# Altium PCB PCB1.PcbDoc
Units mm, origin at the board's own origin, x right, y up, seen from the top; angles counter-clockwise.
Board outline 136.14 x 98.81 mm, 2 copper layers (Top Layer, Bottom Layer); 78 components, 72 nets, 268 pads, 20 vias.
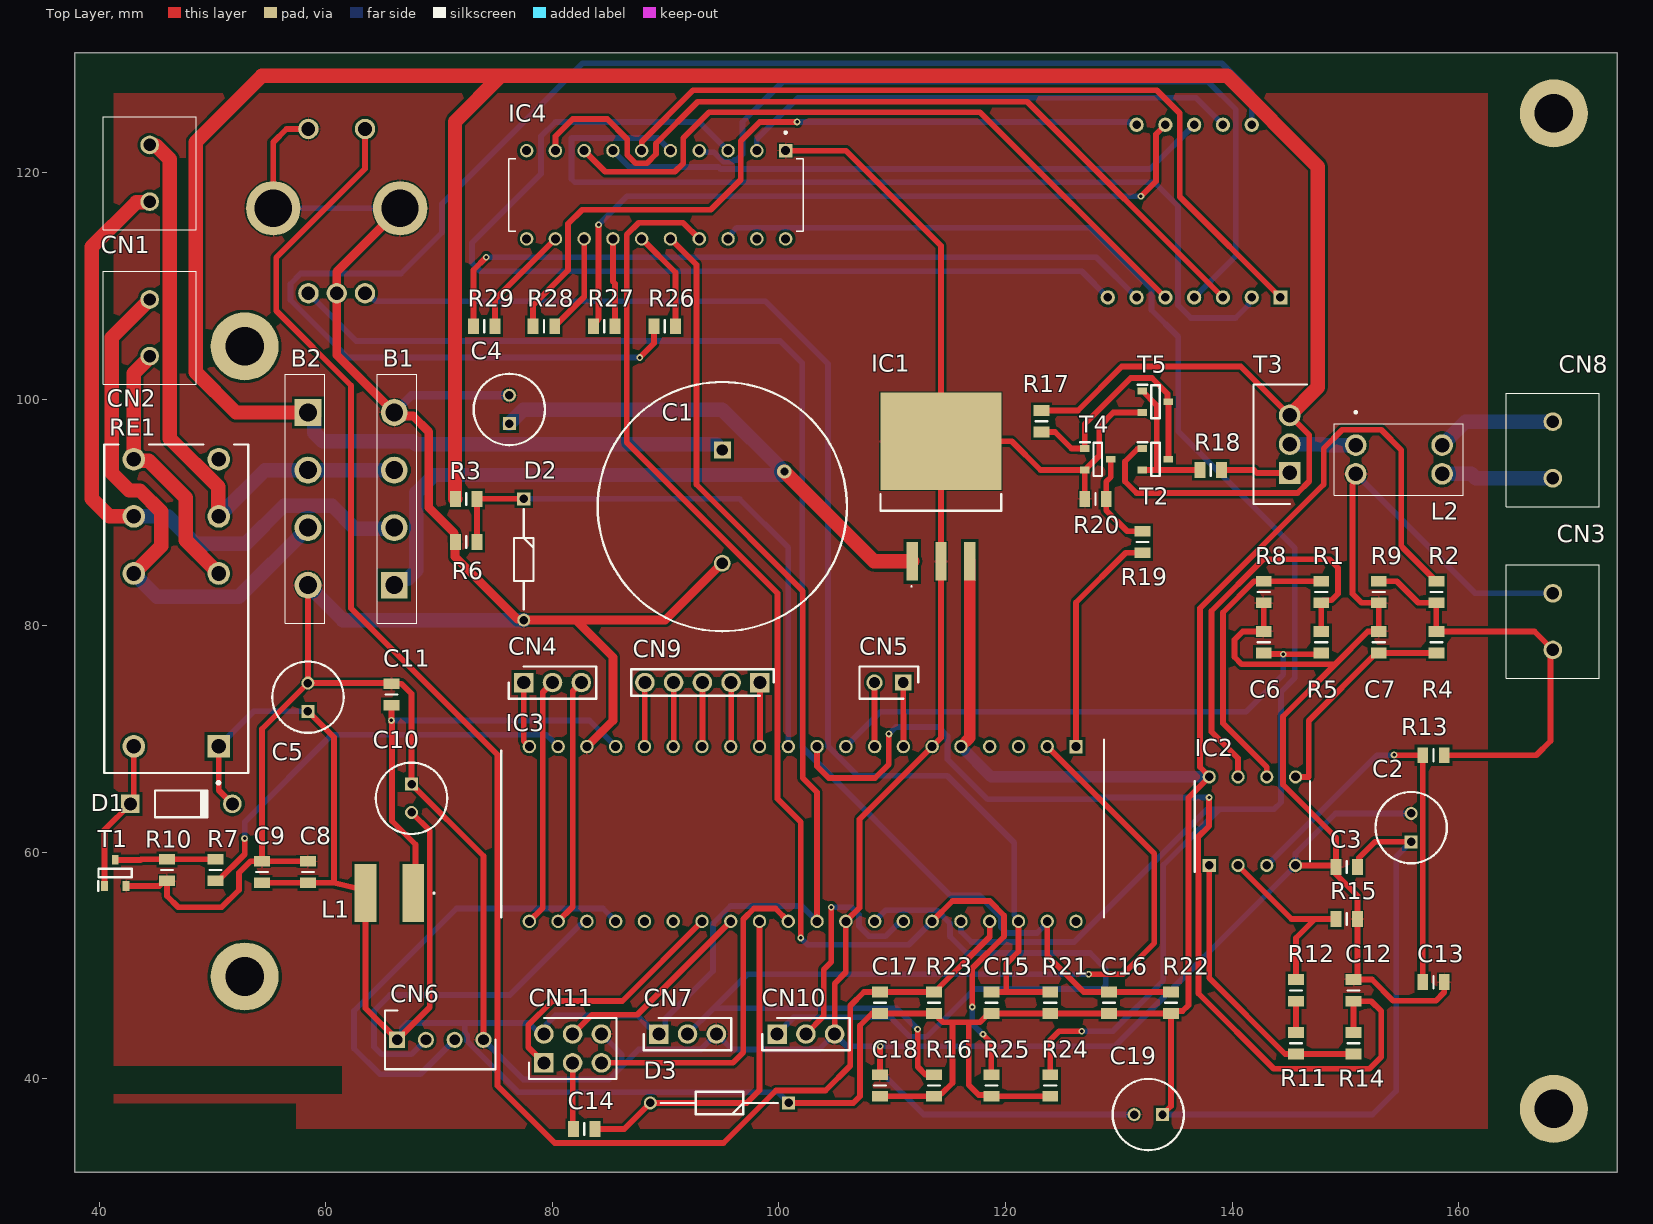
[diagram p0: Top Layer view]
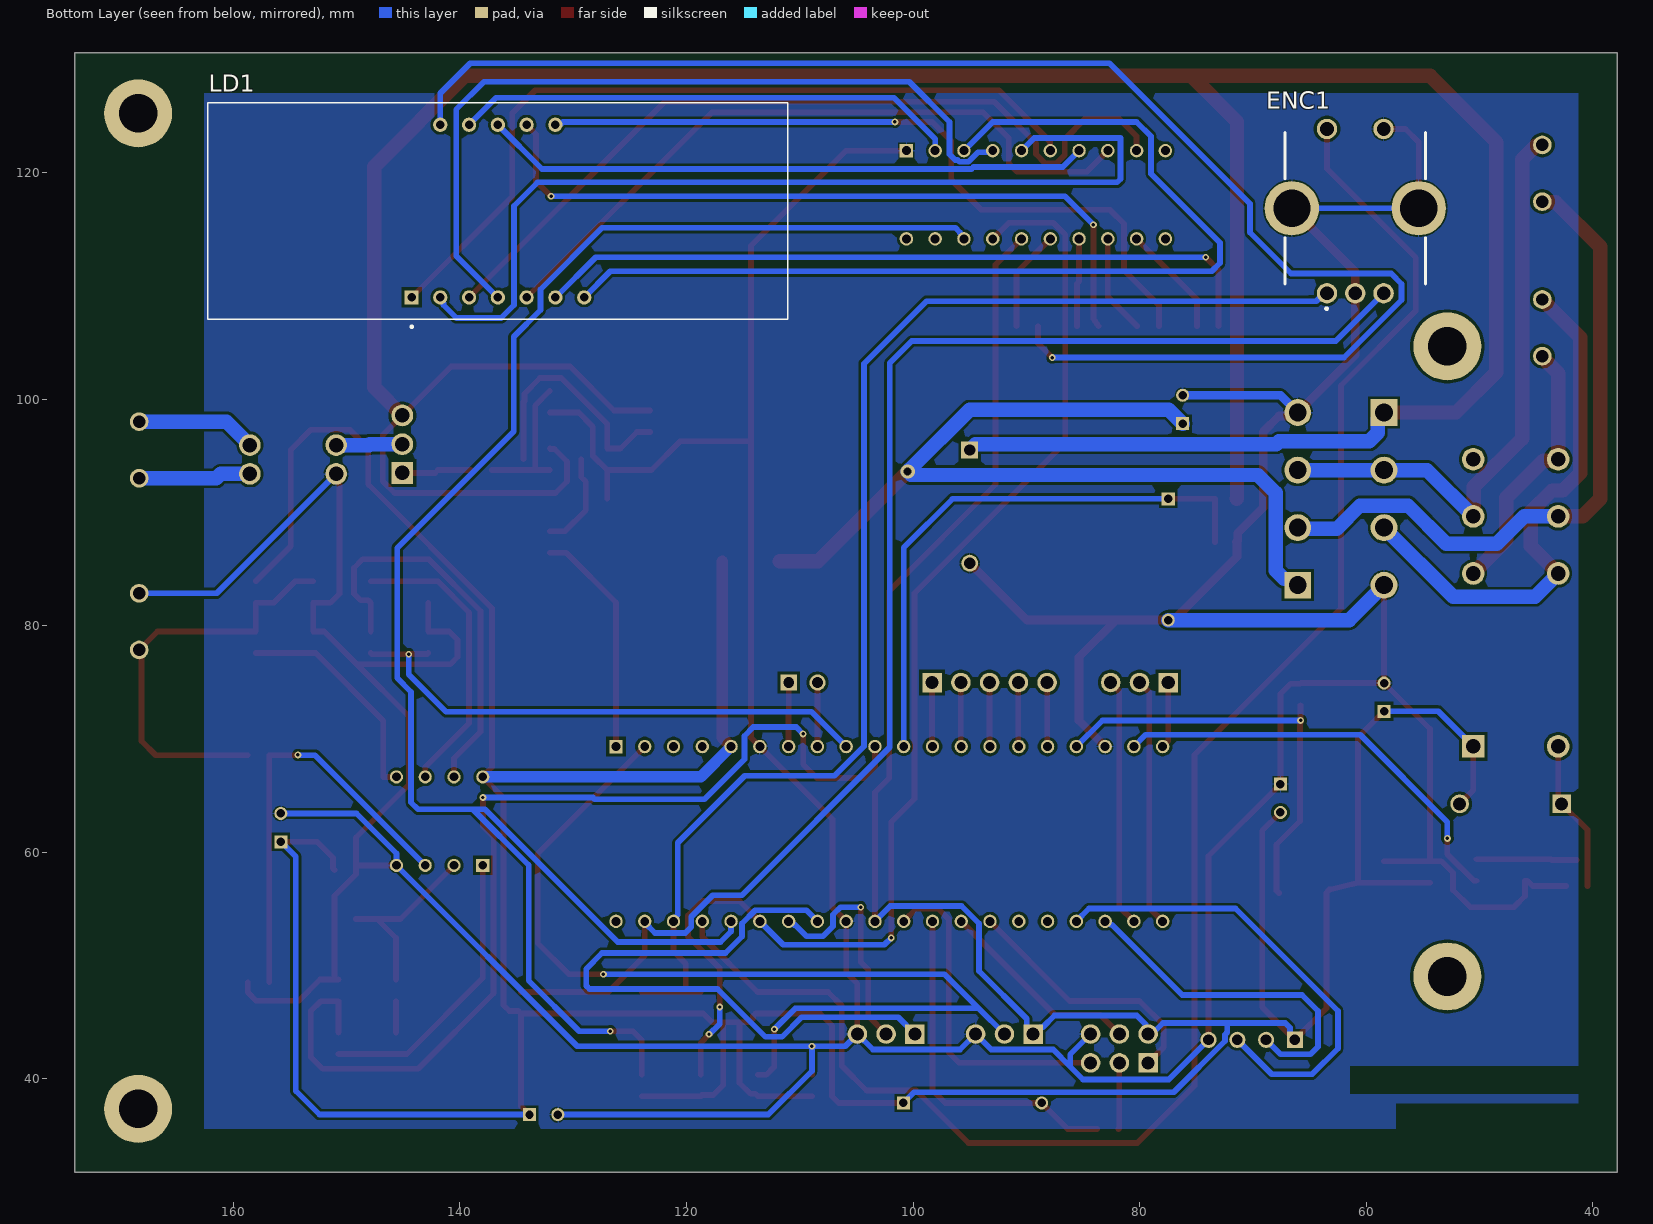
[diagram p1: Bottom Layer view, seen from below]
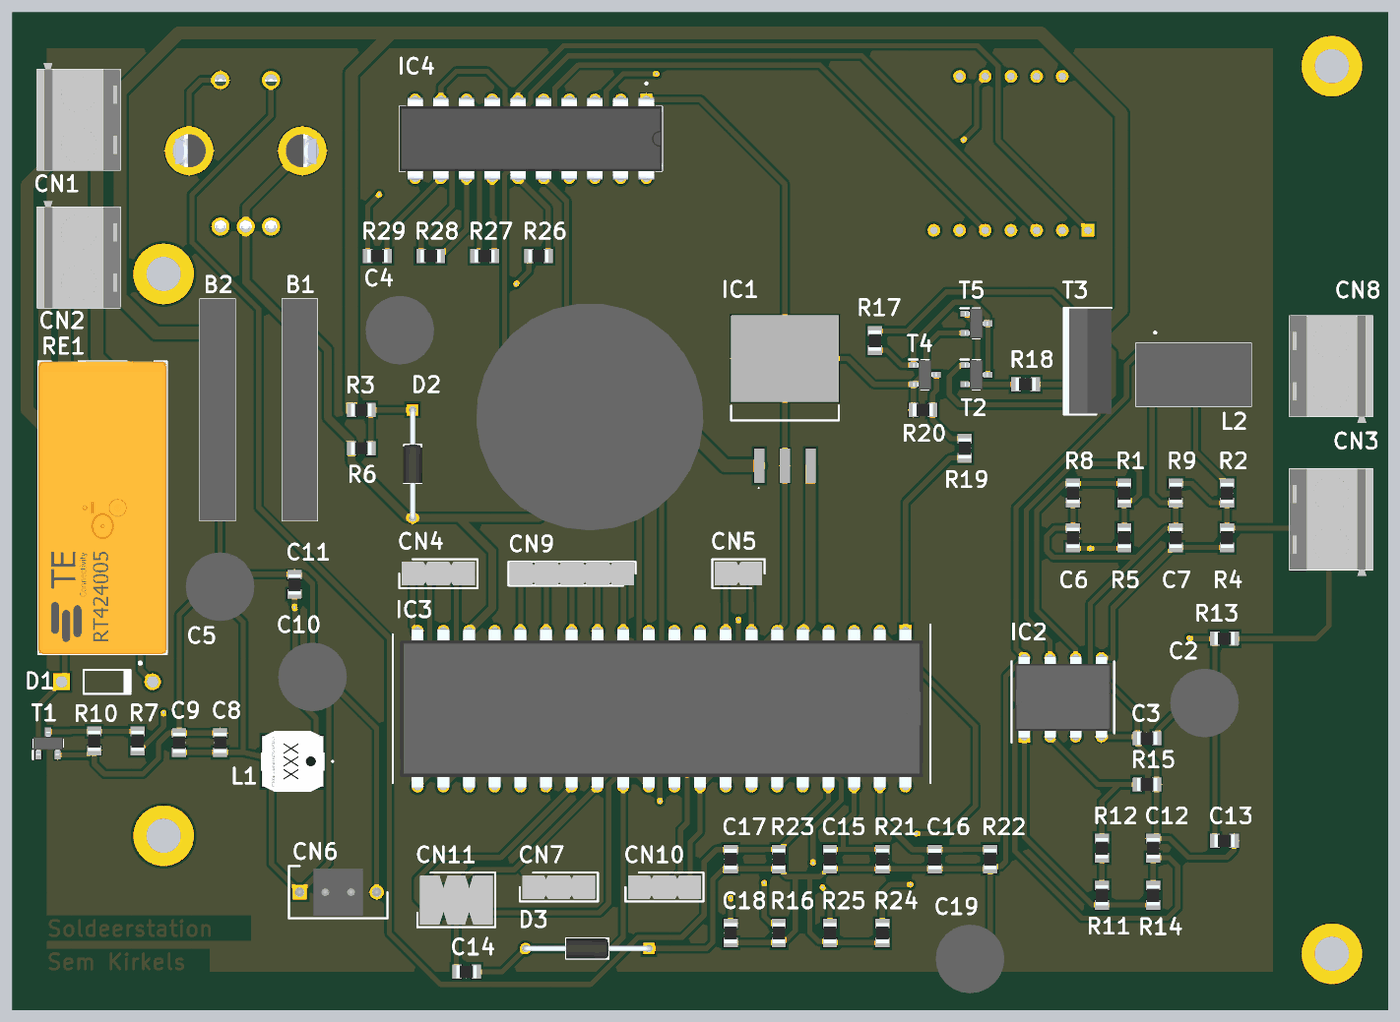
[diagram p2: 3D render of the assembled board from above, using the file's embedded part models]

## Layer stack, top to bottom
Top Solder: solder mask 0.0102, Solder Resist, Dk 3.5
Top Layer: signal copper 0.0356
Dielectric 1: dielectric 0.32, FR-4, Dk 4.8
Bottom Layer: signal copper 0.0356
Bottom Solder: solder mask 0.0102, Solder Resist, Dk 3.5

## Board outline
37.846,31.75 173.99,31.75 173.99,130.556 37.846,130.556

## Design rules (kind name [scope] priority, off if disabled: settings)
BoardOutlineClearance [All] p1: gap=0.2 ignorepadtopadclearanceinfootprint=FALSE
Clearance Clearance_2 [InNamedPolygon('GND_L02_P003')] p1: gap=0.254 ignorepadtopadclearanceinfootprint=FALSE except(0: Arc-Hole Track-Hole SMDPad-Hole THPad-Hole Via-Hole Fill-Hole Poly-Hole Region-Hole Text-Hole)
Clearance Clearance_1 [InNamedPolygon('GND_L01_P001')] p2: gap=0.254 ignorepadtopadclearanceinfootprint=FALSE except(0: Arc-Hole Track-Hole SMDPad-Hole THPad-Hole Via-Hole Fill-Hole Poly-Hole Region-Hole Text-Hole)
Clearance [All] p3: gap=0.127 ignorepadtopadclearanceinfootprint=FALSE except(0.25: Arc-Hole Track-Hole SMDPad-Hole THPad-Hole Via-Hole Fill-Hole Poly-Hole Region-Hole Text-Hole)
ComponentClearance [All] p1: gap=0.127 collisioncheckmode=3 verticalgap=0.127 showdistances=TRUE
DiffPairsRouting [All] p1: maxlimit=0.254 minlimit=0.127 mostfreqgap=0.127 toplayer_minwidth=0.127 toplayer_maxwidth=25.4 toplayer_prefwidth=0.127 bottomlayer_minwidth=0.127 bottomlayer_maxwidth=25.4 bottomlayer_prefwidth=0.127 maxuncoupledlength=12.7
Height [All] p1: minheight=0 maxheight=1816.048 prefheight=12.7
HoleSize [All] p1: absolutevalues=TRUE maxlimit=6.3 minlimit=0.3 maxpercent=80.000 minpercent=20.000
HoleToHoleClearance [All] p1: gap=0.25 allowstackedmicrovias=FALSE
MinimumAnnularRing [All] p1: minimumring=0.076
MinimumSolderMaskSliver [All] p1: minsoldermaskwidth=0
PlaneClearance [All] p1: clearance=0.127
PlaneConnect PlaneConnectPowerPads [InPadClass('PowerPads')] p1: planeconnectstyle=Direct reliefexpansion=0.508 reliefentries=4 reliefconductorwidth=0.254 reliefairgap=0.254
PlaneConnect [All] p2: pad.planeconnectstyle=Relief pad.reliefexpansion=0.3 pad.reliefentries=4 pad.reliefconductorwidth=0.127 pad.reliefairgap=0.127 via.planeconnectstyle=Direct via.reliefexpansion=0.3 via.reliefentries=4 via.reliefconductorwidth=0.127 via.reliefairgap=0.127
PolygonConnect PolygonConnectPowerPads [All vs (InPadClass('PowerPads'))] p1: connectstyle=Direct reliefconductorwidth=0.254 reliefentries=4 polygonreliefangle="90 Angle" airgapwidth=0.254
PolygonConnect [All] p2: thpad.connectstyle=Relief thpad.reliefconductorwidth=0.127 thpad.reliefentries=4 thpad.polygonreliefangle="90 Angle" thpad.airgapwidth=0.127 smdpad.connectstyle=Relief smdpad.reliefconductorwidth=0.127 smdpad.reliefentries=4 smdpad.polygonreliefangle="90 Angle" smdpad.airgapwidth=0.127 via.connectstyle=Direct via.reliefconductorwidth=0.127 via.reliefentries=4 via.polygonreliefangle="90 Angle" via.airgapwidth=0.127
RoutingVias [All] p1: holewidth=0.3 width=0.6 viastyle="Through Hole" minholewidth=0.3 minwidth=0.6 maxholewidth=0.6 maxwidth=6.6
SilkToSilkClearance [All] p1: silktosilkclearance=0
SilkToSolderMaskClearance [IsPad] p1: minsilkscreentomaskgap=0.127 clearancetoexposedcopper=TRUE
SolderMaskExpansion [All] p1: expansion=0.075 istentingtop=FALSE
Width [All] p1: maxlimit=25.4 minlimit=0.127 preferedwidth=0.127 minimp=50.000000 maximp=50.000000 favimp=50.000000
20 further rules are at their usual default settings.

## Classes and differential pairs
component class Voeding_Soldeerbout: B1 B2 C1 C4 C5 CN1 CN2 D1 D2 IC1 R3 R6 R7 R10 RE1 T1
component class Versterker: C2 C3 C6 C7 C12 C13 CN3 IC2 R1 R2 R4 R5 R8 R9 R11 R12 R13 R14 R15
component class Regelaar: CN8 L2 R17 R18 R19 R20 T2 T3 T4 T5
component class Display: C15 C16 C17 C18 C19 ENC1 IC4 LD1 R21 R22 R23 R24 R25 R26 R27 R28 R29
component class CPU: C8 C9 C10 C11 C14 CN4 CN5 CN6 CN7 CN9 CN10 CN11 D3 IC3 L1 R16

## Components (designator, comment, footprint, x,y, rotation, side; value= is the part's Value field where it differs from the comment)
B1 "GBU6J" "Bridge Rectifier" 66.04,83.566 r270 top
B2 "GBU6J" "Bridge Rectifier" 58.42,98.806 r90 top
C1 "4700uF 50V" "Elco 4700uF 50V" 94.996,95.504 r270 top
C2 "10uF" "Elco 100uF 25V" 155.807,60.914 r90 top
C3 "10 nF" 0805 150.114,58.674 r180 top
C4 "100uF 25V" "Elco 100uF 25V" 76.2,97.83 r90 top
C5 "10uF 50V" "Elco 100uF 25V" 58.42,72.43 r90 top
C6 "10 nF" 0805 142.793,78.519 r90 top
C7 "10 nF" 0805 152.953,78.519 r90 top
C8 "10 nF" 0805 58.42,58.237 r90 top
C9 "10 nF" 0805 54.366,58.237 r90 top
C10 "10uF 50V" "Elco 100uF 25V" 67.564,66 r270 top
C11 "10 nF" 0805 65.786,73.914 r90 top
C12 "10 nF" 0805 150.727,47.796 r90 top
C13 "10 nF" 0805 157.782,48.521 r0 top
C14 "10 nF" 0805 82.804,35.56 r180 top
C15 "10 nF" 0805 118.75,46.711 r90 top
C16 "10 nF" 0805 129.126,46.703 r90 top
C17 "10 nF" 0805 108.925,46.703 r90 top
C18 "10 nF" 0805 108.925,39.393 r90 top
C19 "100uF 50V" "Elco 100uF 25V" 133.858,36.83 r180 top
CN1 "282836-2" 2828362 44.45,117.428 r270 top
CN2 "282836-2" 2828362 44.45,103.786 r270 top
CN3 "282836-2" 2828362 168.319,82.849 r90 top
CN4 "5-146280-3" HDRV3W97P0X254_1X3_721X234X821P 77.47,74.972 r0 top
CN5 "5-146280-2" HDRV2W77P0X254_1X2_467X234X872P 110.969,74.972 r180 top
CN6 "5-146280-4" HDRV4W77P254_4X1_467X488X821P 66.294,43.434 r270 top
CN7 "5-146280-3" HDRV3W97P0X254_1X3_721X234X821P 89.391,43.942 r0 top
CN8 "282836-2" 2828362 168.319,98.006 r90 top
CN9 "5-146280-5" HDRV5W67P0X254_1X5_1229X234X821P 98.323,74.972 r180 top
CN10 "5-146280-3" HDRV3W97P0X254_1X3_721X234X821P 99.838,43.942 r0 top
CN11 "2x3 Pin Header" HDRV6W67P254_2X3_721X488X872P 79.248,41.402 r0 top
D1 "1N4007-T" DIOD-DO-41-P-2_V 47.244,64.262 r0 top
D2 "5V1" DIOAD1068W53L380D172 77.47,91.186 r270 top
D3 "1N4148-B" DIOAD1220W56L420D200 100.846,37.858 r180 top
ENC1 "PEC11R-4225F-S0024" PEC12R-4XXXF-SXXXX_1 60.96,116.84 r180 bottom
IC1 "TL780-05CKTTR" "DC-DC Convertor" 114.3,92.411 r0 top
IC2 "MCP6002-I/P" Opamp 141.793,62.733 r90 top
IC3 "ATMEGA4809-PF" DIP1543W58P254L5175H635Q40N 102.094,61.606 r270 top
IC4 "TM1637" TM1637 89.154,118.03 r270 top
L1 "10uH" VLS6045 65.6,56.388 r180 top
L2 "Smoorspoel commom mode" CM2545X171B10 150.92,95.936 r270 top
LD1 "HDSP-B09G" "7 Segment Display" 136.652,116.586 r180 bottom
R1 "18k" 0805 147.873,82.959 r90 top
R2 "1M" 0805 158.033,82.959 r90 top
R3 "68k" 0805 72.39,91.186 r180 top
R4 "5k6" 0805 158.033,78.519 r90 top
R5 "5k6" 0805 147.873,78.519 r90 top
R6 "10k" 0805 72.39,87.376 r0 top
R7 "10k" 0805 50.254,58.42 r90 top
R8 "100" 0805 142.793,82.959 r90 top
R9 "10M" 0805 152.953,82.959 r90 top
R10 "4k7" 0805 45.974,58.42 r90 top
R11 "18k" 0805 145.647,43.134 r270 top
R12 "18k" 0805 145.647,47.796 r90 top
R13 "5k6" 0805 157.782,68.55 r0 top
R14 "5k6" 0805 150.727,43.134 r270 top
R15 "100" 0805 150.114,54.102 r0 top
R16 "4k7" 0805 113.69,39.393 r90 top
R17 "4k7" 0805 123.19,98.044 r90 top
R18 "100" 0805 138.11,93.726 r0 top
R19 "10k" 0805 132.08,87.376 r90 top
R20 "4k7" 0805 127.95,91.186 r0 top
R21 "10k" 0805 123.946,46.711 r90 top
R22 "10k" 0805 134.606,46.711 r90 top
R23 "10k" 0805 113.69,46.711 r90 top
R24 "4k7" 0805 123.946,39.393 r90 top
R25 "4k7" 0805 118.75,39.393 r90 top
R26 "200" 0805 89.916,106.426 r180 top
R27 "200" 0805 84.582,106.426 r180 top
R28 "200" 0805 79.248,106.426 r180 top
R29 "200" 0805 73.98,106.426 r180 top
RE1 "RT424005" FP-RT424005-MFG 46.796,81.492 r90 top
T1 "CMPT5551" SOT95P230X109-3N 41.402,58.166 r90 top
T2 "CMPT5551" SOT95P230X109-3N 133.23,94.676 r0 top
T3 "IRF9Z34NPBF" TO254P469X1042X1967-3P 145.087,93.471 r90 top
T4 "CMPT5551" SOT95P230X109-3N 128.15,94.676 r0 top
T5 "CMPT5551" SOT95P230X109-3N 133.23,99.756 r0 top

## Footprints (in the part's own frame and the unit in brackets; to place one, negate y for a bottom-side part, rotate by r counter-clockwise, add the part's x,y. Pads: shape width x height; smd on the part's side, far side on the other; paste and mask are expansions set on the pad)
"7 Segment Display" [mm]
  rect 1.262x1.262 hole 0.754: 1(-7.62,-7.62)
  round 1.262 hole 0.754: 2(-5.08,-7.62) 3(-2.54,-7.62) 4(0,-7.62) 5(2.54,-7.62) 6(5.08,-7.62) 7(7.62,-7.62) 8(5.08,7.62) 9(2.54,7.62) 10(0,7.62) 11(-2.54,7.62) 12(-5.08,7.62)
  silkscreen extent -25.6,-10.3 25.6,9.55
0805 [mm]
  rect 0.95x1.4 smd: 1(-0.95,0) 2(0.95,0)
  silkscreen extent 0,-0.53 0,0.52, body extent -1,-0.63 1,0.63, height 0.6
2828362 [mm]
  round 1.65 hole 1.1: 1(0,0) 2(-5,0)
  silkscreen extent -7.5,-4.1 2.5,4.1, body extent -8.09,-4.1 2.51,4.1, height 10.02
"Bridge Rectifier" [mm]
  rect 2.37x2.37 hole 1.58: 1(0,0)
  round 2.37 hole 1.58: 2(-5.08,0) 3(-10.16,0) 4(-15.24,0)
  silkscreen extent -18.62,-1.5 3.38,2, body extent -18.62,-1.5 3.38,2, height 18.9
CM2545X171B10 [mil]
  round 75 hole 50: 1(0,0) 2(100,0) 3(100,300) 4(0,300)
  silkscreen extent -118,-74 174,374, body extent -74,-74 174,374, height 378
"DC-DC Convertor" [mm]
  rect 1x3.4 smd: 1(-2.54,-6.745) 2(0,-6.745) 3(2.54,-6.745)
  rect 10.7x8.6 smd: 4(0,3.855)
  silkscreen extent -5.33,-9 5.33,-0.8
DIOAD1068W53L380D172 [mm]
  rect 1.15x1.15 hole 0.75: 1(0,0)
  round 1.15 hole 0.75: 2(10.7,0)
  silkscreen extent 0.93,-0.86 9.77,0.86, body extent -0.26,-0.95 10.95,0.95, height 1.9
DIOAD1220W56L420D200 [mm]
  rect 1.15x1.15 hole 0.75: 1(0,0)
  round 1.15 hole 0.75: 2(12.2,0)
  silkscreen extent 0.93,-1 11.27,1, body extent -0.28,-1 12.48,1, height 1.99
DIOD-DO-41-P-2_V [mm] "2-Leads, Axial Lead, Body 4.635x2.36mm, Pin Spacing 9mm"
  rect 1.65x1.65 hole 1.15: 1(-4.5,0)
  round 1.65 hole 1.15: 2(4.5,0)
  silkscreen extent -2.32,-1.18 2.32,1.18, body extent -4.93,-1.18 4.93,1.18, height 2.35
DIP1543W58P254L5175H635Q40N [mil]
  rect 46.61x46.61 hole 30.87: 1(-303.74,950)
  round 46.61 hole 30.87: 2(-303.74,850) 3(-303.74,750) 4(-303.74,650) 5(-303.74,550) 6(-303.74,450) 7(-303.74,350) 8(-303.74,250) 9(-303.74,150) 10(-303.74,50) 11(-303.74,-50) 12(-303.74,-150) 13(-303.74,-250) 14(-303.74,-350) 15(-303.74,-450) 16(-303.74,-550) 17(-303.74,-650) 18(-303.74,-750) 19(-303.74,-850) 20(-303.74,-950) 21(303.74,-950) 22(303.74,-850) 23(303.74,-750) 24(303.74,-650) 25(303.74,-550) 26(303.74,-450) 27(303.74,-350) 28(303.74,-250) 29(303.74,-150) 30(303.74,-50) 31(303.74,50) 32(303.74,150) 33(303.74,250) 34(303.74,350) 35(303.74,450) 36(303.74,550) 37(303.74,650) 38(303.74,750) 39(303.74,850) 40(303.74,950)
  silkscreen extent -327,-1047 290,1047, body extent -309,-1019 309,1019, height 250
"Elco 100uF 25V" [mm]
  rect 1.15x1.15 hole 0.75: 1(0,0)
  round 1.15 hole 0.75: 2(2.5,0)
  silkscreen extent -1.9,-3.15 4.4,3.15, body extent -2.15,-3.4 4.65,3.4, height 12.7
"Elco 4700uF 50V" [mm]
  rect 1.5x1.5 hole 1: 1(0,0)
  round 1.5 hole 1: 2(10,0)
  silkscreen extent -6,-11 16,11, body extent -6.25,-11.25 16.25,11.25, height 37
FP-RT424005-MFG [mm]
  round 2 hole 1.3 paste-1000 mask+0: 11(8.15,-3.75) 12(3.11,-3.75) 14(13.19,-3.75) 21(8.15,3.75) 22(3.11,3.75) 24(13.19,3.75) A2(-12.15,3.75)
  rect 2x2 hole 1.3 paste-1000 mask+0: A1(-12.15,-3.75)
  silkscreen extent -15.5,-6.35 14.5,6.35, body extent -14.6,-6.45 14.6,6.45, height 0.25
HDRV2W77P0X254_1X2_467X234X872P [mm]
  rect 1.425x1.425 hole 0.95: 1(0,0)
  round 1.425 hole 0.95: 2(2.54,0)
  silkscreen extent -1.32,-1.43 3.86,1.42, body extent -1.07,-1.17 3.61,1.17, height 8.12
HDRV3W97P0X254_1X3_721X234X821P [mm]
  rect 1.725x1.725 hole 1.15: 1(0,0)
  round 1.725 hole 1.15: 2(2.54,0) 3(5.08,0)
  silkscreen extent -1.32,-1.42 6.4,1.43, body extent -1.07,-1.17 6.15,1.17, height 8.12
HDRV4W77P254_4X1_467X488X821P [mm]
  rect 1.425x1.425 hole 0.95: 1(0,0)
  round 1.425 hole 0.95: 2(0,2.54) 3(0,5.08) 4(0,7.62)
  silkscreen extent -2.59,-1.06 2.59,8.68, body extent -2.33,-0.38 2.33,8, height 8.21
HDRV5W67P0X254_1X5_1229X234X821P [mm]
  rect 1.725x1.725 hole 1.15: 1(0,0)
  round 1.725 hole 1.15: 2(2.54,0) 3(5.08,0) 4(7.62,0) 5(10.16,0)
  silkscreen extent -1.21,-1.17 11.37,1.17, body extent -1.07,-1.17 11.23,1.17, height 8.12
HDRV6W67P254_2X3_721X488X872P [mm]
  rect 1.725x1.725 hole 1.15: 1(0,0)
  round 1.725 hole 1.15: 2(0,2.54) 3(2.54,0) 4(2.54,2.54) 5(5.08,0) 6(5.08,2.54)
  silkscreen extent -1.32,-1.42 6.4,3.96, body extent -1.07,-1.17 6.15,3.71, height 8.12
Opamp [mm]
  rect 1.159x1.159 hole 0.759: 1(-3.905,3.81)
  round 1.159 hole 0.759: 2(-3.905,1.27) 3(-3.905,-1.27) 4(-3.905,-3.81) 5(3.905,-3.81) 6(3.905,-1.27) 7(3.905,1.27) 8(3.905,3.81)
  silkscreen extent -4.48,-5.08 3.56,5.08, body extent -4.05,-4.75 4.05,4.75, height 5.33
PEC12R-4XXXF-SXXXX_1 [mm]
  round 1.8 hole 1.2: 1(-2.5,-7.5) 2(2.5,-7.5) 3(0,-7.5) 4(-2.5,7) 5(2.5,7)
  round 4.8 hole 3.28: 6(5.6,0) 7(-5.6,0)
  silkscreen extent -6.2,-8.95 6.2,6.7, body extent -7,-7.75 6.99,7.15, height 31.51
SOT95P230X109-3N [mm]
  rect 0.85x0.6 smd: 1(-1.15,0.95) 2(-1.15,-0.95) 3(1.15,0)
  silkscreen extent -1.58,-1.46 0.38,1.5, body extent -1.15,-1.46 1.15,1.46, height 1.09
TM1637 [mm]
  rect 1.19x1.19 hole 0.79: 1(-3.89,11.43)
  round 1.19 hole 0.79: 2(-3.89,8.89) 3(-3.89,6.35) 4(-3.89,3.81) 5(-3.89,1.27) 6(-3.89,-1.27) 7(-3.89,-3.81) 8(-3.89,-6.35) 9(-3.89,-8.89) 10(-3.89,-11.43) 11(3.89,-11.43) 12(3.89,-8.89) 13(3.89,-6.35) 14(3.89,-3.81) 15(3.89,-1.27) 16(3.89,1.27) 17(3.89,3.81) 18(3.89,6.35) 19(3.89,8.89) 20(3.89,11.43)
  silkscreen extent -5.58,-13 3.2,13, body extent -4.03,-13 4.03,13, height 4.31
TO254P469X1042X1967-3P [mm]
  rect 1.92x1.92 hole 1.28: 1(0,0)
  round 1.92 hole 1.28: 2(2.54,0) 3(5.08,0)
  silkscreen extent -2.73,-1.49 7.81,3.2, body extent -2.67,-1.5 7.75,3.19, height 18.84
VLS6045 [mm]
  rect 1.9x5.1 smd: 1(-2.1,0) 2(2.1,0)
  silkscreen extent -4,-0.05 -3.9,0.05, body extent -3.15,-3 3.15,3, height 4.5

## Part data
B1 B2: "Bridge Rectifier", Manufacturer_Name="GeneSiC Semiconductor", Datasheet Link=https://www.diodemodule.com/silicon_products/bridge_rectifiers/gbu6j.pdf, Height=18.8mm, Manufacturer_Part_Number=GBU6J
C1 C2 C4 C5 C10 C19: library part "Condensator Elco", Manufacturer="AVX Interconnect / Elco", Part Number=02015A270JAT2A
C3 C6 C7 C8 C9 C11 C12 C13 C14 C15 C16 C17 C18: library part "Condensator 0805", "Chip Multilayer Ceramic Capacitors for General Purpose, 0805, 10uF, X5R, 15%, 10%, 25V", Capacitance=10uF, Case Code (Imperial)=0805, Case Code (Metric)=2012, Dielectric=X5R, Max Operating Temperature=85°C, Min Operating Temperature=-55°C, Package Quantity=1, Tolerance=10%, Voltage=25V, Case/Package=0805, Depth=1.25mm, Height=1.25mm, Lead Free="Lead Free", Length=2mm, Material=Ceramic, Mount="Surface Mount", Packaging="Tape and Reel", Radiation Hardening=No, Termination=SMD/SMT, Thickness=0.053inch, Voltage Rating=25V, Voltage Rating (DC)=25V, Width=0.049inch
CN1 CN2: library part "Schroefconnector 2 Pin", "Connector", Manufacturer_Name="TE Connectivity", Datasheet Link=https://www.te.com/commerce/DocumentDelivery/DDEController?Action=showdoc&DocId=Customer+Drawing%7F282836%7FJ%7Fpdf%7FEnglish%7FENG_CD_282836_J.pdf%7F282836-2, Height=10mm, Manufacturer_Part_Number=282836-2
CN3 CN8: library part "Schroefconnector 2 Pin R", "Connector", Manufacturer_Name="TE Connectivity", Datasheet Link=https://www.te.com/commerce/DocumentDelivery/DDEController?Action=showdoc&DocId=Customer+Drawing%7F282836%7FJ%7Fpdf%7FEnglish%7FENG_CD_282836_J.pdf%7F282836-2, Height=10mm, Manufacturer_Part_Number=282836-2
CN4 CN7: library part "3 Pin Header L", "Connector 5-146280-3", Manufacturer_Name="TE Connectivity", Mouser2 Part Number=571-5-146280-3, Datasheet Link=https://componentsearchengine.com//5-146280-3.pdf, Height=8.21mm, Manufacturer_Part_Number=5-146280-3, Mouser2 Price/Stock=https://www.mouser.com/Search/Refine.aspx?Keyword=571-5-146280-3
CN5: library part "2 Pin Header L", "Connector", Manufacturer_Name="TE Connectivity", Datasheet Link=http://www.te.com/commerce/DocumentDelivery/DDEController?Action=showdoc&DocId=Customer+Drawing%7F146280%7FH2%7Fpdf%7FEnglish%7FENG_CD_146280_H2.pdf%7F5-146280-2, Height=8.72mm, Manufacturer_Part_Number=5-146280-2
CN6: library part "4 Pin Header L", "Connector 5-146280-4", Manufacturer_Name="TE Connectivity", Datasheet Link=https://datasheet.datasheetarchive.com/originals/distributors/DKDS-20/396066.pdf, Height=8.21mm, Manufacturer_Part_Number=5-146280-4
CN9: library part "5 Pin Header", "Connector 5-146280-5", Manufacturer_Name="TE Connectivity", Mouser2 Part Number=571-5-146280-5, Datasheet Link=https://componentsearchengine.com//5-146280-5.pdf, Height=8.21mm, Manufacturer_Part_Number=5-146280-5, Mouser2 Price/Stock=https://www.mouser.com/Search/Refine.aspx?Keyword=571-5-146280-5
CN10: library part "3 Pin Header", "Connector 5-146280-3", Manufacturer_Name="TE Connectivity", Mouser2 Part Number=571-5-146280-3, Datasheet Link=https://componentsearchengine.com//5-146280-3.pdf, Height=8.21mm, Manufacturer_Part_Number=5-146280-3, Mouser2 Price/Stock=https://www.mouser.com/Search/Refine.aspx?Keyword=571-5-146280-3
CN11: "Connector", Manufacturer_Name="TE Connectivity", Manufacturer_Part_Number=5-146256-3, Datasheet Link=https://www.te.com/commerce/DocumentDelivery/DDEController?Action=srchrtrv&DocNm=146256&DocType=Customer+Drawing&DocLang=English, Height=8.72mm
D1: library part CMP-0639-00008-2, "1.0 A Rectifier, 8 pF, 1000 V, -65 to 150 degC, 2-Pin DO-41 Plastic, RoHS, Tape and Reel", Manufacturer="Diodes Inc", Max. Average Rectified Current IO (A)=1, Operating Temperature Range (degC)="-65 to 150", ComponentLink1Description="Manufacturer URL", ComponentLink1URL=http://diodes.com/, ComponentLink2Description=Datasheet, ComponentLink2URL=http://diodes.com/datasheets/ds28002.pdf, CT (pF)=8, DatasheetVersion="Rev. 8-2", Max. IFSM (A)=30, Max. IR (uA)=5, Mounting Technology="Through Hole", PackageDescription="2-Pin Axial Lead, Body 4.635 x 2.36 mm, Lead Spread 25.4 mm", PackageReference=DO-41-P-2, Packing="Tape and Reel", PartNumber=1N4007-T, RoHS=TRUE, VF (V)=1, VRRM (V)=1000
D2: library part 1N5231CTR, "Zener Diode", Manufacturer_Name="ON Semiconductor", Mouser2 Part Number=512-1N5231CTR, Datasheet Link=https://componentsearchengine.com//1N5231CTR.pdf, Manufacturer_Part_Number=1N5231CTR, Mouser2 Price/Stock=https://www.mouser.com/Search/Refine.aspx?Keyword=512-1N5231CTR
D3: "Diode", Manufacturer_Name=Rectron, Manufacturer_Part_Number=1N4148-B
ENC1: library part Encoder, "Undefined or Miscellaneous", Manufacturer_Name=Bourns, Mouser2 Part Number=652-PEC11R-4225F-S24, Datasheet Link=https://componentsearchengine.com//PEC11R-4225F-S0024.pdf, Manufacturer_Part_Number=PEC11R-4225F-S0024, Mouser2 Price/Stock=https://www.mouser.com/Search/Refine.aspx?Keyword=652-PEC11R-4225F-S24
IC1: library part "DC/DC Convertor", "IC REG LIN 5V 1.5A DDPAK/TO263-3", Case/Package=TO-263, Dropout Voltage=2V, Max Input Voltage=25V, Max Operating Temperature=125°C, Max Output Current=1.5A, Max Output Voltage=5V, Min Input Voltage=7V, Min Operating Temperature=0°C, Output Voltage Accuracy=1%, Package Quantity=1, Power Supply Rejection Ratio (PSRR)=85dB, Quiescent Current=8mA, Accuracy=1%, Height=4.83mm, Lead Free="Lead Free", Length=10.67mm, Mount="Surface Mount", Nominal Output Voltage=5V, Number of Outputs=1, Number of Pins=3, Number of Regulators=1, Output Current=1.5A, Output Type=Fixed, Output Voltage=5V, Packaging="Tape and Reel", Polarity=Positive, REACH SVHC="No SVHC", Weight=0.050897oz, Width=9.65mm
IC2: library part Opamp, "AMP-OPA-MCP6002-IL8", Case/Package=PDIP, Input Bias Current=1pA, Input Offset Voltage (Vos)=4.5mV, Max Frequency=1kHz, Max Input Voltage=6V, Max Operating Temperature=85°C, Min Input Voltage=1.8V, Min Operating Temperature=-40°C, Nominal Supply Current=100uA, Operating Supply Voltage=5.5V, Output Current=23mA, Package Quantity=60, Power Supply Rejection Ratio (PSRR)=86dB, Voltage Gain=112dB, Amplifier Type="GENERAL PURPOSE", Bandwidth=1MHz, Common Mode Rejection Ratio=60dB, Gain Bandwidth Product=1MHz, Height=0.195inch, Input Offset Voltage-Max=4.5mV, Lead Free="Lead Free", Length=0.4inch, Max Supply Voltage=6V, Min Supply Voltage=1.8V, Mount="Through Hole", Number of Amplifiers=2, Number of Channels=2, Number of Circuits=2, Number of Elements=2, Number of Pins=8, Operating Supply Current=100uA, Output Current per Channel=23mA, Packaging=Rail/Tube, Radiation Hardening=No, REACH SVHC="No SVHC", RoHS Compliant=Yes, Slew Rate=0.6V/µs, Slew Rate-Nom=0.6V/µs, Supply Current=100uA, Technology=CMOS, Unity Gain Bandwidth Product=1MHz, Width=0.28inch
IC3: "Integrated Circuit", Manufacturer_Name=Microchip, Mouser2 Part Number=556-ATMEGA4809-PF, Datasheet Link=https://componentsearchengine.com//ATMEGA4809-PF.pdf, Height=6.35mm, Manufacturer_Part_Number=ATMEGA4809-PF, Mouser2 Price/Stock=https://www.mouser.com/Search/Refine.aspx?Keyword=556-ATMEGA4809-PF
IC4: "LED Drive Control Special Circuit", Package=Package, Availability="Not in stock", Check_prices=https://www.snapeda.com/parts/TM1637/Titan+Micro+Electronics/view-part/?ref=eda, MF="Titan Micro Electronics", MP=TM1637, Price=None, SnapEDA_Link=https://www.snapeda.com/parts/TM1637/Titan+Micro+Electronics/view-part/?ref=snap
L1: library part Smoorspoel, "Inductor VLS6045EX-100M-H", Manufacturer_Name=TDK, Manufacturer_Part_Number=VLS6045EX-100M-H, Mouser2 Part Number=810-VLS6045EX-100M-H, Datasheet Link=https://componentsearchengine.com//VLS6045EX-100M-H.pdf, Mouser2 Price/Stock=https://www.mouser.com/Search/Refine.aspx?Keyword=810-VLS6045EX-100M-H
L2: "Transformer CM2545X171B-10", Manufacturer_Name="Laird Technologies", Manufacturer_Part_Number=CM2545X171B-10, Datasheet Link=https://datasheet.datasheetarchive.com/originals/dk/DKDS-7/122753.pdf, Height=9.5mm
LD1: library part "7 Segment Display", "Display Modules - LED Character and Numeric Green 7-Segment Clock 4 Character Common Cathode 2.2V 20mA 0.752 H x 2.016 W x 0.315 D _19.10mm x 51.20mm x 8.00mm_ 12-DIP _0.600, 15.24mm_", Package="DIP-12 Broadcom", Availability=Unavailable, MF="Broadcom Limited", MP=HDSP-B09G, Price=None, SnapEDA_Link=https://www.snapeda.com/parts/HDSP-B09G/Broadcom%20Limited/view-part/1797524/?ref=snap
R1 R2 R3 R4 R5 R6 R7 R8 R9 R10 R11 R12 R13 R14 R15 R16 R17 R18 R19 R20 R21 R22 R23 R24 R25 R26 R27 R28 R29: library part "Resistor 0805", Manufacturer="Vishay Dale", Part Number=CRCW08050000Z0EA
RE1: library part CMP-03395-000087-1, "RELAY GENERAL PURPOSE DPDT 8A 5V", Ambient Temperature Range High=+85°C, Ambient Temperature Range Low=-40°C, Coil Power=403mW, Coil Resistance=62Ω, Coil Voltage=5V, Current Rating=8A, Manufacturer="TE Connectivity", Automotive=No, Category=Relay, Coil Type=Non-Latching, ComponentLink2Description=Datasheet, ComponentLink2URL=https://www.te.com/commerce/DocumentDelivery/DDEController?Action=showdoc&DocId=Data+Sheet%7FRT2%7F1014%7Fpdf%7FEnglish%7FENG_DS_RT2_1014.pdf%7F5-1393243-9, Device Class L1=Electromechanical, Device Class L2=Relays, Device Class L3="Power Relays", Digikey Description="RELAY GENERAL PURPOSE DPDT 8A 5V", Height=15.7mm, Lead Free=Yes, Manufacturer Part Number=RT424005, Mouser Description="General Purpose Relay, Rt2 Series, Power, Non Latching, Dpdt, 5 Vdc, 8 A Rohs Compliant: Yes", Number Of Contacts=2, Octopart=https://octopart.com/5-1393243-9-te+connectivity-41835766, Package=RT424005, RoHS=TRUE, Throw Configuration=DPDT
T1: "Transistor", Manufacturer_Name="Central Semiconductor", Manufacturer_Part_Number="CMPT5551 TR PBFREE", Datasheet Link=https://my.centralsemi.com/datasheets/CMPT5551.PDF, Height=1.09mm
T2 T4 T5: library part Transistor_L, "Transistor", Manufacturer_Name="Central Semiconductor", Manufacturer_Part_Number="CMPT5551 TR PBFREE", Datasheet Link=https://my.centralsemi.com/datasheets/CMPT5551.PDF, Height=1.09mm
T3: "MOSFET (P-Channel)", Manufacturer_Name=Infineon, Mouser2 Part Number=942-IRF9Z34NPBF, Datasheet Link=https://componentsearchengine.com//IRF9Z34NPBF.pdf, Height=4.69mm, Manufacturer_Part_Number=IRF9Z34NPBF, Mouser2 Price/Stock=https://www.mouser.com/Search/Refine.aspx?Keyword=942-IRF9Z34NPBF

## Free pads (board coordinates)
  round 6 hole 3.4: M3(52.832,49.022) M3(52.832,104.648) M3(168.402,37.338) M3(168.402,125.222)

## Via types
v1: diameter 0.6, hole 0.3, Top Layer to Bottom Layer, 19 vias
v2: diameter 1.27, hole 0.711, Top Layer to Bottom Layer, 1 vias

## Nets (pads, with @x,y where several pads share a name; then routed paths per layer and width w, separated by ;. In a path a pad name is that pad's centre, name@x,y a point inside that pad or via, vN(x,y) a via of type N, cw(c..) or ccw(c..) an arc to the next point about the centre after c; other vN are vias at no path point)
+5V: C2.1 C3.1 C5.1 C8.1 C9.1 C10.2 C15.1 C16.1 C17.1 C18.1 C19.1 CN6.1 CN7.1 CN11.2 D1.2 D3.1 IC1.3 IC2.8 IC3.5 IC3.31 IC4.16 L1.2 R2.2 R16.1 R21.1 R22.1 R23.1 R24.1 R25.1 RE1.A1 | length 466.3
  Top Layer w0.508: RE1.A1 50.546,65.46 D1.2 ; C9.1 60.716,57.287 ; C5.1 60.716,70.134 60.716,57.287 ; C10.2 69.164,61.9 69.164,46.304 CN6.1 63.5,46.228 L1.2 63.429,56.503 63.398,56.552 63.254,56.696 60.716,57.287 ; IC4.16 92.71,111.854 92.71,92.456 102.108,83.058 102.108,66.548 103.364,65.292 IC3.31 ; D3.1 106.565,37.858 107.163,38.456 107.163,44.704 108.212,45.753 C17.1 ; C18.1 R16.1 113.911,38.664 114.356,38.664 115.316,39.624 115.316,44.977 ; C17.1@108.934,45.761 113.915,45.761 114.136,45.54 114.136,45.315 114.475,44.977 115.316,44.977 ; 116.84,44.977 117.74,44.977 118.525,45.761 R21.1 126.517,45.761 126.526,45.753 C16.1 131.851,45.753 131.86,45.761 R22.1 ; R24.1 121.336,38.443 R25.1 118.623,38.57 117.64,38.57 116.76,39.45 116.76,44.977 115.316,44.977 ; C19.1 134.606,37.578 R22.1 ; C3.1@151.064,58.42 151.207,58.563 151.207,59.513 152.608,60.914 C2.1 ; R2.2 154.94,87.003 154.94,95.504 153.162,97.282 149.733,97.282 148.082,95.631 148.082,92.456 137.16,81.534 137.16,67.515 137.983,66.693 IC2.8 136.144,64.799 136.144,46.482 135.636,45.974 134.818,45.974 R22.1
  Top Layer w1.016: IC3.5 116.84,70.098 IC1.3
  Bottom Layer w0.508: RE1.A1 53.634,72.43 C5.1 ; CN6.1 66.722,43.862 66.722,44.493 67.151,44.922 72.256,44.922 ; D3.1 100.525,38.179 99.89,38.814 88.25,38.814 88.248,38.811 76.99,38.811 72.468,43.334 72.468,43.887 72.256,44.098 72.256,44.922 ; IC3.31 102.004,55.251 95.727,55.251 94.177,53.7 94.177,49.501 89.969,45.292 89.969,44.52 CN7.1 88.782,44.551 88.545,44.551 87.524,45.572 80.247,45.572 79.481,44.806 79.481,44.175 CN11.2 78.919,43.942 77.938,44.922 72.256,44.922 ; C19.1 152.4,36.83 154.483,38.913 154.483,59.59 C2.1
  Bottom Layer w1.016: IC3.5 118.747,66.638 IC2.8
GND: B1.4 B2.4 C1.2 C2.2 C3.2 C4.2 C5.2 C6.2 C7.2 C8.2 C9.2 C10.1 C11.2 C12.2 C13.2 C18.2 C19.2 CN3.1 CN6.4 CN7.3 CN10.3 CN11.6 D2.2 ENC1.3 ENC1.5 ENC1.6 ENC1.7 IC1.2 IC1.4 IC2.4 IC3.6 IC3.18 IC3.32 IC4.1 L2.2 R6.1 R8.1 R9.1 R10.1 R15.2 R20.1 T1.2 T4.2 T5.2 | length 569.5
  Top Layer w0.508: T1.2 45.295,57.016 45.749,57.47 R10.1 45.974,56.134 46.965,55.143 50.8,55.143 52.324,56.667 52.324,58.171 53.34,59.187 C9.2 ; ENC1.6 55.36,122.67 56.53,123.84 ENC1.5 ; C8.2 57.328,59.187 C9.2 ; B2.4 C5.2 ; CN6.4 73.914,59.65 C10.1 67.564,73.975 66.675,74.864 C11.2 65.72,74.93 C5.2 ; IC4.1 105.918,121.92 114.3,113.538 IC1.4 ; CN10.3 104.918,48.412 105.904,49.399 IC3.32 107.112,55.099 107.112,62.909 IC3.6 114.3,70.098 IC1.2 IC1.4 ; C18.2 v1(108.925,42.872) ; R20.1 T4.2 ; T5.2 129.515,98.806 128.27,97.561 128.27,94.996 T4.2 ; R8.1 C6.2 140.937,79.469 140.208,78.74 140.208,77.216 140.838,76.586 149.103,76.586 ; IC2.4 149.01,58.828 C3.2 ; C12.2 C12.2@150.843,48.746 ; L2.2 150.652,93.129 150.652,92.43 150.622,92.4 150.622,82.804 151.415,82.011 152.952,82.011 R9.1 C7.2 151.986,79.469 149.103,76.586 ; C13.2 158.732,47.625 157.995,46.888 154.207,46.888 152.349,48.746 C12.2@150.843,48.746 ; C9.2 54.366,70.876 C5.2 ; IC1.4 120.548,96.266 123.088,93.726 T4.2 ; 149.103,76.586 144.501,71.984 144.501,65.964 149.164,61.3 C3.2 ; C3.2 149.164,58.052 151.064,56.152 R15.2 151.064,48.967 C12.2@150.843,48.746
  Top Layer w0.762: ENC1.3 60.968,109.332 60.968,103.891 66.04,98.819 B1.4 66.343,98.503 67.704,98.503 69.088,97.119 69.088,90.424 71.346,88.166 71.346,87.47 R6.1 71.406,87.342 71.406,86.074 76.92,80.56 77.396,80.56 D2.2 77.475,80.491 82.069,80.491 ; ENC1.3@60.96,109.367 60.968,109.375 60.968,111.245 66.56,116.836 ENC1.7 ; IC3.18 85.344,71.622 85.344,77.216 82.069,80.491 ; C1.2 94.969,85.504 89.956,80.491 82.069,80.491
  Bottom Layer w0.508: ENC1.6 ENC1.7 ; CN6.4 77.419,39.929 84.988,39.929 86.131,41.072 ; CN11.6 86.131,42.139 86.131,41.072 ; C19.2 112.776,36.83 108.925,40.681 v1(108.925,42.872) ; L2.2 161.467,82.849 CN3.1 ; C2.2 149.139,63.414 145.603,59.878 IC2.4 129.646,42.872 v1(108.925,42.872) ; 86.131,41.072 87.63,42.57 93.099,42.57 CN7.3 95.843,42.57 103.546,42.57 CN10.3 105.988,42.872 v1(108.925,42.872)
  Bottom Layer w0.762: B1.4 67.564,100.33 C4.2
  Bottom Layer w1.27: B2.4 61.5,80.486 D2.2
NetB1_1: B1.1 C4.1 IC1.1 | length 84
  Top Layer w1.27: v2(100.482,93.599) 100.482,93.574 108.39,85.666 IC1.1
  Bottom Layer w1.27: B1.1 66.59,84.116 67.243,84.116 67.987,84.86 67.987,91.711 69.571,93.294 100.178,93.294 v2(100.482,93.599) ; C4.1 77.425,99.055 95.002,99.055 100.268,93.788 v2@100.294,93.788
NetB1_2: B1.2 CN1.1 RE1.21 | length 59.6
  Top Layer w1.27: RE1.21 40.889,89.642 39.345,91.186 39.345,113.444 43.256,117.355 44.377,117.355 CN1.1
  Bottom Layer w1.27: RE1.21 46.045,89.642 48.463,87.224 52.934,87.224 56.303,90.593 60.542,90.593 62.603,88.532 65.926,88.532 B1.2
NetB1_3: B1.3 B2.2 CN1.2 RE1.11 | length 52.8
  Top Layer w1.27: CN1.2 44.523,122.355 45.042,122.355 46.228,121.17 46.228,96.508 50.489,92.248 50.489,89.699 RE1.11
  Bottom Layer w1.27: RE1.11 54.63,93.726 B2.2 B1.3
NetB2_3: B2.3 CN2.2 RE1.22 | length 47.7
  Top Layer w1.27: RE1.22 45.466,87.022 45.466,90.043 43.586,91.923 42.647,91.923 41.097,93.472 41.097,105.433 CN2.2
  Bottom Layer w1.27: RE1.22 45.098,82.55 52.324,82.55 B2.3
NetC6_1: C6.1 IC3.9 R5.1 | length 48.2
  Top Layer w0.508: C6.1 142.875,77.488 144.508,77.488 v1(144.526,77.47) 147.774,77.47 R5.1
  Bottom Layer w0.508: IC3.9 108.972,72.39 141.224,72.39 144.526,75.692 v1(144.526,77.47)
NetC7_1: C7.1 IC2.5 R4.1 | length 19.9
  Top Layer w0.508: IC2.5 146.761,66.638 146.761,71.6 152.73,77.569 C7.1 R4.1
NetC11_1: C11.1 IC3.17 L1.1 | length 38.3
  Top Layer w0.508: C11.1 v1(65.786,71.628) 65.804,71.61 65.804,71.458 65.842,71.42 65.842,62.741 67.906,60.677 67.906,56.594 L1.1
  Bottom Layer w0.508: v1(65.786,71.628) 83.277,71.628 IC3.17
NetC12_1: C12.1 IC3.10 R14.1 | length 90.7
  Top Layer w0.508: IC3.10 103.364,67.578 104.394,66.548 108.483,66.548 109.703,67.767 v1(109.703,70.434) ; v1(137.973,64.821) 137.973,62.3 137.922,62.249 137.022,61.349 137.022,58.091 137.033,58.08 137.033,47.523 143.688,40.869 152.121,40.869 153.162,41.91 153.162,45.974 152.29,46.846 C12.1 R14.1
  Bottom Layer w0.508: v1(109.703,70.434) 110.312,71.044 114.097,71.044 114.884,70.256 114.884,68.199 118.416,64.667 128.105,64.667 128.259,64.821 v1(137.973,64.821)
NetC13_1: C13.1 IC2.3 R13.1 | length 37.8
  Top Layer w0.508: v1(154.305,68.58) 154.33,68.58 154.36,68.55 R13.1 C13.1
  Bottom Layer w0.508: IC2.3 152.797,68.562 154.287,68.562 v1(154.305,68.58)
NetC14_1: C14.1 D3.2 IC3.29 | length 30.9
  Top Layer w0.508: C14.1 86.348,35.56 D3.2 97.155,37.858 98.284,38.986 IC3.29
NetC14_2: C14.2 CN11.3 | length 5.9
  Top Layer w0.508: CN11.3 81.788,35.626 C14.2
NetC15_2: C15.2 ENC1.1 IC3.38 R21.2 | length 116.1
  Top Layer w0.508: C15.2 120.066,47.661 ; IC3.38 121.144,51.224 120.066,50.146 120.066,47.661 ; R21.2 120.066,47.661
  Bottom Layer w0.508: ENC1.1 63.688,109.34 64.404,108.624 98.821,108.624 104.337,103.109 104.337,69.348 106.942,66.744 114.856,66.744 120.771,60.828 120.771,54.447 121.144,54.074 IC3.38
NetC16_2: C16.2 ENC1.2 IC3.39 R22.2 | length 124.8
  Top Layer w0.508: IC3.39 123.684,50.868 126.898,47.653 C16.2 131.851,47.653 131.86,47.661 R22.2
  Bottom Layer w0.508: ENC1.2 62.681,105.119 100.113,105.119 102.057,103.175 102.057,69.252 115.11,56.199 117.672,56.199 119.577,54.294 119.577,53.397 120.116,52.858 122.771,52.858 123.684,53.77 IC3.39
NetC17_2: C17.2 ENC1.4 IC3.37 R23.2 | length 153.4
  Top Layer w0.508: ENC1.4 63.46,120.331 55.626,112.497 55.626,107.798 62.23,101.194 62.23,81.534 75.159,68.605 75.159,39.37 80.213,34.315 95.098,34.315 99.746,38.964 104.115,38.964 106.299,41.148 106.299,46.434 107.518,47.653 C17.2 112.268,47.653 112.276,47.661 R23.2 113.741,47.661 118.604,52.524 IC3.37
NetCN2_1: CN2.1 RE1.12 RE1.24 | length 23.8
  Top Layer w1.27: RE1.24@43.046,94.484 RE1.24 ; CN2.1 44.45,103.683 43.046,102.279 RE1.24 ; RE1.12 47.625,87.523 47.625,91.288 44.37,94.542 43.186,94.542 RE1.24
NetCN3_2: CN3.2 R2.1 R4.2 R9.2 R13.2 | length 37.4
  Top Layer w0.508: R9.2 154.534,83.909 156.434,82.009 R2.1 R4.2 166.698,79.469 CN3.2 168.101,77.63 168.101,69.803 166.848,68.55 R13.2
NetCN4_1: CN4.1 IC3.20 | length 5.9
  Top Layer w0.508: CN4.1 77.47,69.815 IC3.20
NetCN4_2: CN4.2 IC3.21 | length 21.9
  Top Layer w0.508: IC3.21 79.146,55.074 79.146,74.109 CN4.2
NetCN4_3: CN4.3 IC3.22 | length 21.9
  Top Layer w0.508: IC3.22 81.788,55.176 81.788,74.21 CN4.3
NetCN5_1: CN5.1 IC3.7 | length 5.7
  Top Layer w0.508: CN5.1 110.969,72.15 110.984,72.136 IC3.7
NetCN5_2: CN5.2 IC3.8 | length 5.7
  Top Layer w0.508: CN5.2 108.429,72.15 108.444,72.136 IC3.8
NetCN6_2: CN6.2 IC3.23 | length 30.6
  Bottom Layer w0.508: CN6.2 67.564,42.164 64.924,42.164 64.262,42.826 64.262,45.974 65.666,47.378 76.226,47.378 82.442,53.594 82.564,53.594 82.861,53.891 IC3.23
NetCN6_3: CN6.3 IC3.24 | length 41.7
  Bottom Layer w0.508: CN6.3 68.327,40.387 64.769,40.387 62.484,42.672 62.484,45.974 71.526,55.016 84.459,55.016 IC3.24
NetCN7_2: CN7.2 IC3.2 R16.2 | length 89.7
  Top Layer w0.508: v1(112.243,44.374) 112.243,41.046 112.946,40.343 R16.2 ; IC3.2 133.14,59.865 133.14,51.987 130.378,49.225 v1(127.33,49.225)
  Bottom Layer w0.508: CN7.2 94.217,46.228 ; v1(112.243,44.374) 110.388,46.228 94.217,46.228 ; v1(127.33,49.225) 97.214,49.225 94.217,46.228
NetCN8_1: CN8.1 L2.4 | length 10.6
  Bottom Layer w1.27: L2.4 160.61,98.006 CN8.1
NetCN8_2: CN8.2 L2.3 | length 9.9
  Bottom Layer w1.27: L2.3 161.112,93.396 161.502,93.006 CN8.2
NetCN9_1: CN9.1 IC3.12 | length 5.7
  Top Layer w0.508: IC3.12 98.323,69.36 CN9.1
NetCN9_2: CN9.2 IC3.13 | length 5.7
  Top Layer w0.508: IC3.13 95.783,69.36 CN9.2
NetCN9_3: CN9.3 IC3.14 | length 5.7
  Top Layer w0.508: IC3.14 93.243,69.36 CN9.3
NetCN9_4: CN9.4 IC3.15 | length 5.7
  Top Layer w0.508: IC3.15 IC3.15 90.702,69.361 CN9.4@90.702,74.971 ; CN9.4@90.702,74.971 CN9.4
NetCN9_5: CN9.5 IC3.16 | length 5.7
  Top Layer w0.508: IC3.16 IC3.16 88.162,69.361 CN9.5@88.162,74.971 ; CN9.5@88.162,74.971 CN9.5
NetCN10_1: CN10.1 IC3.33 | length 57.3
  Bottom Layer w0.508: CN10.1 101.311,45.415 109.839,45.415 111.562,43.693 113.035,43.693 117.254,47.912 128.555,47.912 128.853,48.21 128.853,49.69 127.456,51.087 116.553,51.087 115.091,52.549 115.091,53.7 113.927,54.864 109.417,54.864 IC3.33
NetCN10_2: CN10.2 IC3.34 | length 20.7
  Top Layer w0.508: CN10.2 103.962,45.527 103.962,49.632 104.623,50.292 v1(104.623,55.143)
  Bottom Layer w0.508: v1(104.623,55.143) 106.408,55.143 107.068,54.483 107.068,53.46 107.95,52.578 109.398,52.578 110.398,53.578 110.487,53.578 110.801,53.891 IC3.34
NetCN11_1: CN11.1 IC3.27 | length 23
  Top Layer w0.508: CN11.1 77.876,42.774 77.876,44.729 80.01,46.863 86.175,46.863 IC3.27
NetCN11_4: CN11.4 IC3.28 | length 18.1
  Top Layer w0.508: CN11.4 83.49,45.644 87.496,45.644 IC3.28
NetCN11_5: CN11.5 IC3.30 | length 29.5
  Top Layer w0.508: CN11.5 95.936,41.402 96.85,42.316 96.85,54.077 97.79,55.016 99.699,55.016 IC3.30
NetD1_1: D1.1 RE1.A2 T1.1 | length 13.4
  Top Layer w0.508: T1.1 40.452,61.97 D1.1 43.046,64.564 RE1.A2
NetD2_1: D2.1 IC3.11 R3.1 R6.2 | length 50.6
  Top Layer w0.508: R6.2 R3.1 D2.1
  Bottom Layer w0.508: D2.1 96.52,91.186 100.824,86.882 IC3.11
NetIC2_1: IC2.1 R11.2 R14.2 | length 25.5
  Top Layer w0.508: IC2.1 137.983,48.885 144.684,42.184 R11.2 R14.2
NetIC2_2: IC2.2 R12.2 R15.1 | length 16.6
  Top Layer w0.508: IC2.2 145.249,54.102 147.32,54.102 ; R12.2 145.647,52.429 147.32,54.102 ; R15.1 147.32,54.102
NetIC2_6: IC2.6 R1.2 R8.2 | length 25.9
  Top Layer w0.508: IC2.6 143.055,66.647 143.055,67.511 139.192,71.374 139.192,81.159 141.942,83.909 R8.2 R1.2
NetIC2_7: IC2.7 R1.1 R5.2 | length 35.6
  Top Layer w0.508: IC2.7 140.523,68.28 138.176,70.627 138.176,81.28 142.748,85.852 148.59,85.852 149.352,85.09 149.352,82.804 148.778,82.23 148.094,82.23 R1.1 R5.2
NetIC3_1: IC3.1 R19.1 | length 20.4
  Top Layer w0.508: IC3.1 126.224,82.028 130.622,86.426 R19.1
NetIC3_19: IC3.19 R7.1 | length 37.7
  Top Layer w0.508: R7.1 50.479,57.47 52.832,59.823 v1(52.832,61.214)
  Bottom Layer w0.508: v1(52.832,61.214) 52.832,62.662 60.528,70.358 79.467,70.358 IC3.19
NetIC3_35: IC3.35 IC4.17 R25.2 | length 112.2
  Top Layer w0.508: IC4.17 91.534,115.57 87.63,115.57 86.553,114.493 86.553,96.175 99.873,82.855 99.873,69.746 99.851,69.724 99.851,68.918 99.873,68.896 99.873,64.719 101.93,62.662 v1(101.93,52.426) ; IC3.35 115.318,55.685 118.601,55.685 119.871,54.415 119.871,52.561 117.069,49.759 v1(117.069,46.33) ; v1(118.008,43.917) 118.008,43.898 118.75,43.156 R25.2
  Bottom Layer w0.508: v1(101.93,52.426) 102.54,51.816 111.448,51.816 IC3.35 ; v1(117.069,46.33) 117.069,44.838 117.99,43.917 v1(118.008,43.917)
NetIC3_36: IC3.36 IC4.18 R24.2 | length 158.3
  Top Layer w0.508: R24.2 123.946,43.428 124.714,44.196 v1(126.721,44.196)
  Bottom Layer w0.508: IC4.18 95.504,114.325 95.844,114.664 95.844,114.704 96.256,115.116 127.454,115.116 132.893,109.677 132.893,107.855 135.255,105.493 135.255,97.145 145.542,86.858 145.542,75.362 144.308,74.128 144.308,64.393 143.71,63.795 138.862,63.795 ; IC3.36 116.064,52.992 116.986,52.07 126.065,52.07 137.79,63.795 138.862,63.795 ; v1(126.721,44.196) 129.464,44.196 133.934,48.666 133.934,58.867 138.862,63.795
NetIC4_2: IC4.2 LD1.11 | length 44.7
  Bottom Layer w0.508: IC4.2 98.044,122.948 101.69,126.594 136.804,126.594 LD1.11
NetIC4_3: IC4.3 LD1.7 | length 89.2
  Bottom Layer w0.508: IC4.3 92.964,124.46 80.264,124.46 78.994,123.19 78.994,119.888 72.898,113.792 72.898,112.014 73.635,111.277 126.721,111.277 LD1.7
NetIC4_4: IC4.4 LD1.4 | length 71.5
  Bottom Layer w0.508: IC4.4 93.094,121.79 94.254,121.79 95.1,120.944 95.908,120.944 96.071,121.107 96.266,121.107 96.774,121.615 96.774,124.46 100.33,128.016 137.871,128.016 140.335,125.552 140.335,112.649 LD1.4
NetIC4_5: IC4.5 LD1.2 | length 84
  Bottom Layer w0.508: IC4.5 89.306,123.038 81.686,123.038 81.686,119.424 81.984,119.126 133.142,119.126 135.23,117.038 135.23,108.306 136.373,107.163 140.31,107.163 141.446,108.299 141.446,108.475 141.732,108.762 LD1.2
NetIC4_6: IC4.6 LD1.1 | length 71
  Top Layer w0.508: IC4.6 87.884,122.714 92.424,127.254 133.35,127.254 135.382,125.222 135.382,117.856 LD1.1
NetIC4_7: IC4.7 LD1.10 | length 53.6
  Bottom Layer w0.508: IC4.7 86.792,120.472 94.674,120.472 94.837,120.309 132.755,120.309 LD1.10
NetIC4_8: IC4.8 LD1.5 | length 62.3
  Top Layer w0.508: IC4.8 84.669,120.055 90.794,120.055 91.542,120.802 91.542,123.038 93.828,125.324 117.754,125.324 LD1.5
NetIC4_9: IC4.9 LD1.3 | length 73.2
  Top Layer w0.508: IC4.9 80.264,123.19 81.788,124.714 84.836,124.714 86.614,122.936 86.614,121.532 87.329,120.817 88.341,120.817 89.154,121.63 89.154,122.555 92.837,126.238 121.92,126.238 LD1.3
NetIC4_12: IC4.12 R29.1 | length 9.9
  Top Layer w0.508: R29.1 74.93,108.806 IC4.12
NetIC4_13: IC4.13 R28.1 | length 8.8
  Top Layer w0.508: R28.1 82.804,109.032 IC4.13
NetIC4_14: IC4.14 R27.1 | length 7.8
  Top Layer w0.508: IC4.14 85.344,110.373 85.532,110.185 R27.1
NetIC4_15: IC4.15 R26.1 | length 8.9
  Top Layer w0.508: IC4.15 90.866,111.158 R26.1
NetL2_1: L2.1 T3.2 | length 5.9
  Bottom Layer w0.508: 147.955,96.011 148.03,95.936
  Bottom Layer w1.27: T3.2 147.955,96.011 ; 148.03,95.936 L2.1
NetLD1_6: LD1.6 R29.2 | length 65.4
  Top Layer w0.508: R29.2 73.03,111.384 v1(74.168,112.522)
  Bottom Layer w0.508: v1(74.168,112.522) 128.016,112.522 LD1.6
NetLD1_8: LD1.8 R28.2 | length 66.3
  Top Layer w0.508: R28.2 78.298,108.28 81.382,111.364 81.382,115.468 82.626,116.713 93.98,116.713 96.622,119.355 96.622,122.784 98.298,124.46 v1(101.6,124.46)
  Bottom Layer w0.508: v1@101.625,124.46 130.897,124.46 131.007,124.35 131.428,124.35 LD1.8
NetLD1_9: LD1.9 R27.2 | length 65.2
  Top Layer w0.508: R27.2 84.074,107.097 v1(84.074,115.392) ; v1(131.953,117.907) 133.274,119.228 133.274,123.368 LD1.9
  Bottom Layer w0.508: v1(84.074,115.392) 86.589,117.907 v1(131.953,117.907)
NetLD1_12: LD1.12 R26.2 | length 136
  Top Layer w0.508: v1(87.706,103.657) 88.966,104.917 R26.2
  Bottom Layer w0.508: v1(87.706,103.657) 61.951,103.657 56.871,108.737 56.871,110.16 57.785,111.074 66.624,111.074 70.258,114.708 70.258,117.248 82.652,129.642 139.09,129.642 141.732,127 LD1.12
NetR7_2: R7.2 R10.2 T1.3 | length 8.9
  Top Layer w0.508: T1.3 43.637,59.316 43.691,59.37 R10.2 R7.2
NetR11_1: R11.1 R12.1 | length 2.8
  Top Layer w0.508: R11.1 R12.1
NetR17_1: R17.1 T2.3 T4.1 T5.3 | length 22
  Top Layer w0.508: R17.1 124.358,97.094 125.826,95.626 T4.1 127,97.79 131.064,101.854 132.922,101.854 134.307,100.469 134.307,99.802 134.353,99.756 T5.3 T2.3
NetR18_1: R18.1 T2.2 T5.1 | length 12.6
  Top Layer w0.508: T2.2 133.35,93.726 ; T5.1 133.35,99.436 133.35,93.726 ; R18.1 133.35,93.726
NetR18_2: R18.2 T3.1 | length 6.1
  Top Layer w0.508: R18.2 141.935,93.726 142.19,93.471 T3.1
NetR19_2: R19.2 R20.2 T4.3 | length 8.6
  Top Layer w0.508: T4.3 129.3,93.11 128.9,92.71 R20.2 128.9,90.17 130.744,88.326 R19.2
VIN: B2.1 C1.1 R3.2 R17.2 T2.1 T3.3 | length 289.9
  Top Layer w0.508: R17.2 126.39,98.994 130.266,102.87 140.768,102.87 T3.3 146.812,96.826 146.812,92.737 145.769,91.694 131.572,91.694 130.556,92.71 130.556,94.488 131.648,95.58 132.034,95.58 T2.1
  Top Layer w1.27: B2.1 52.07,98.806 48.514,102.362 48.514,122.682 54.356,128.524 75.438,128.524 ; R3.2 71.4,91.226 71.4,124.486 75.438,128.524 ; T3.3 147.574,101.038 147.574,120.514 139.564,128.524 75.438,128.524
  Bottom Layer w1.27: B2.1 58.97,98.256 58.97,97.01 59.714,96.266 67.691,96.266 67.945,96.012 94.488,96.012 C1.1
pads on no net: IC3.3 IC3.4 IC3.25 IC3.26 IC3.40 IC4.10 IC4.11 IC4.19 IC4.20 RE1.14

## Polygon pours and split planes (outlines as drawn)
GND on Top Layer "GND_L01_P001" (solid, pour order 1): 41.275,127 41.275,35.56 162.56,35.56 162.56,127
GND on Bottom Layer "GND_L02_P003" (solid, pour order 3): 41.275,127 41.275,35.56 162.56,35.56 162.56,127

## Other copper
Multi-Layer:
  text "Soldeerstation" at 41.148,39.116 h1.52
  text "Sem Kirkels" at 41.148,35.814 h1.52

## Silkscreen, mask and mechanical layers (free items; w line width, h text height)
boardoutline:
  lines w0.254: 37.973,31.902 37.998,31.877 38.354,31.877 173.863,31.877 173.863,130.429 37.973,130.429 37.973,32.258 37.973,31.902